# Altium PCB stc-mainboard-v2.PcbDoc
Units mil, origin at the board's own origin, x right, y up, seen from the top; angles counter-clockwise.
Board outline 4725.03 x 3095.65 mil, 2 copper layers (Top Layer, Bottom Layer); 86 components, 82 nets, 391 pads, 141 vias.
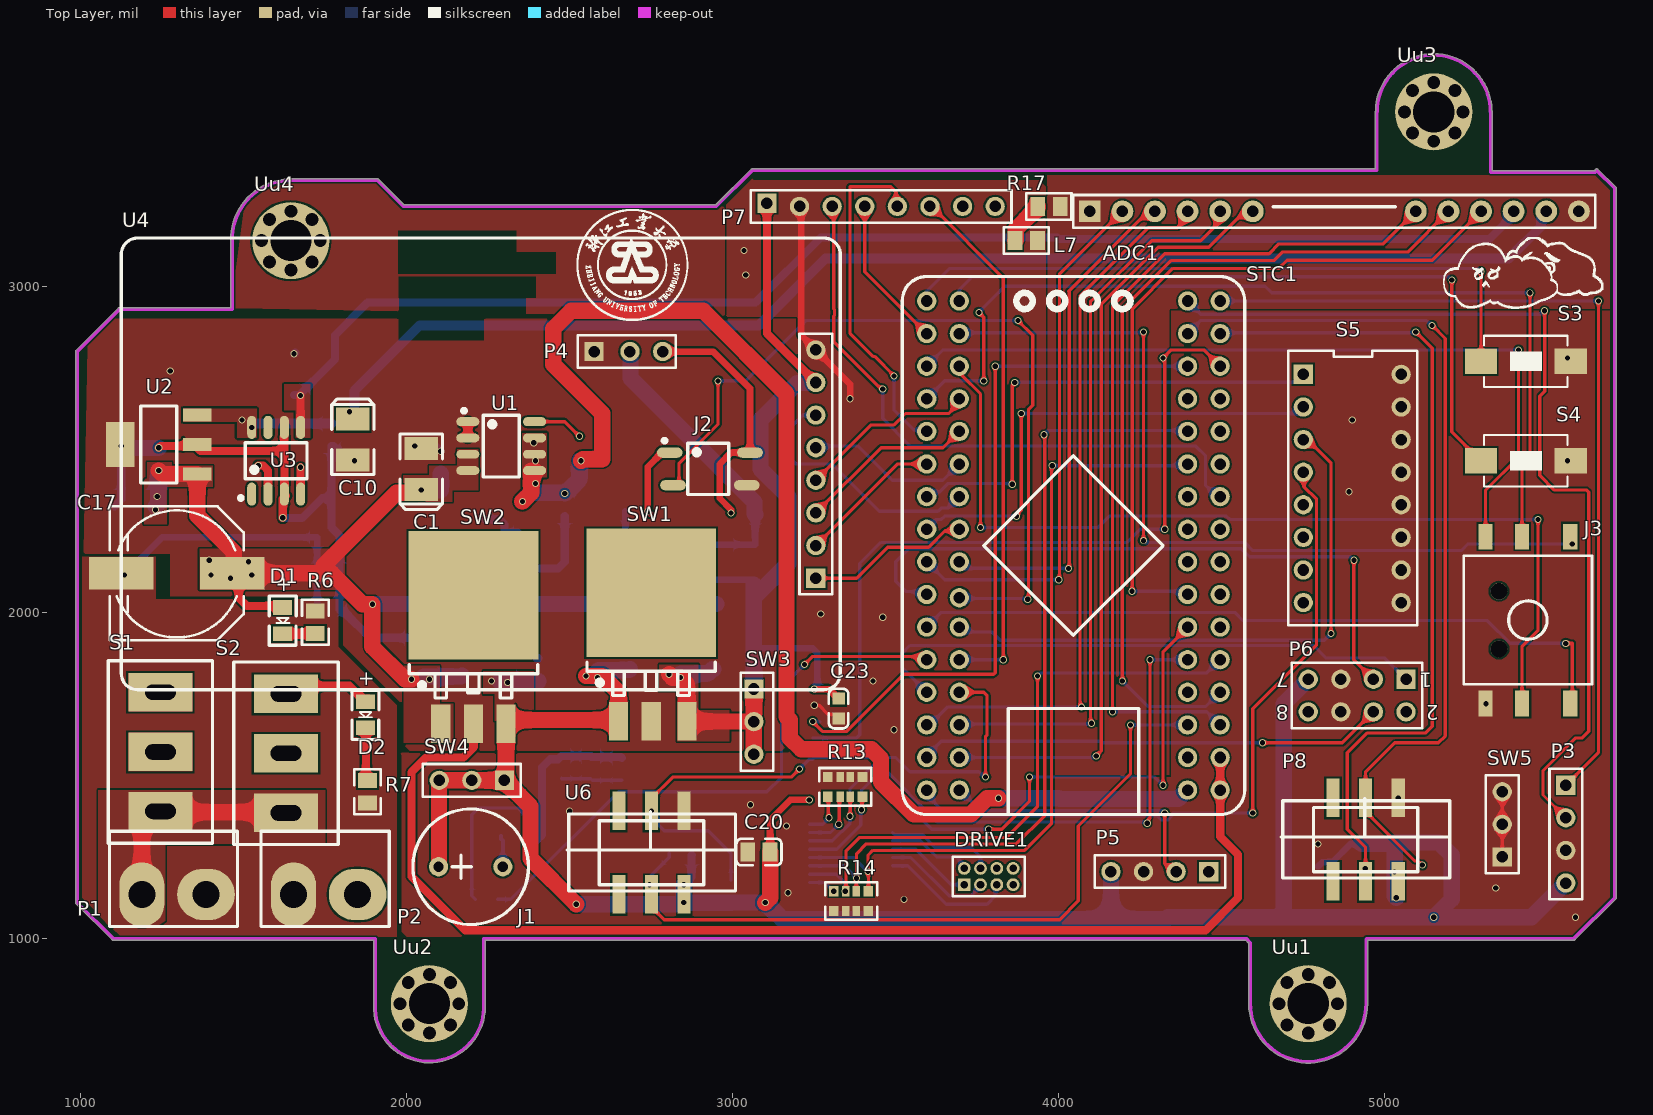
[diagram p0: Top Layer view]
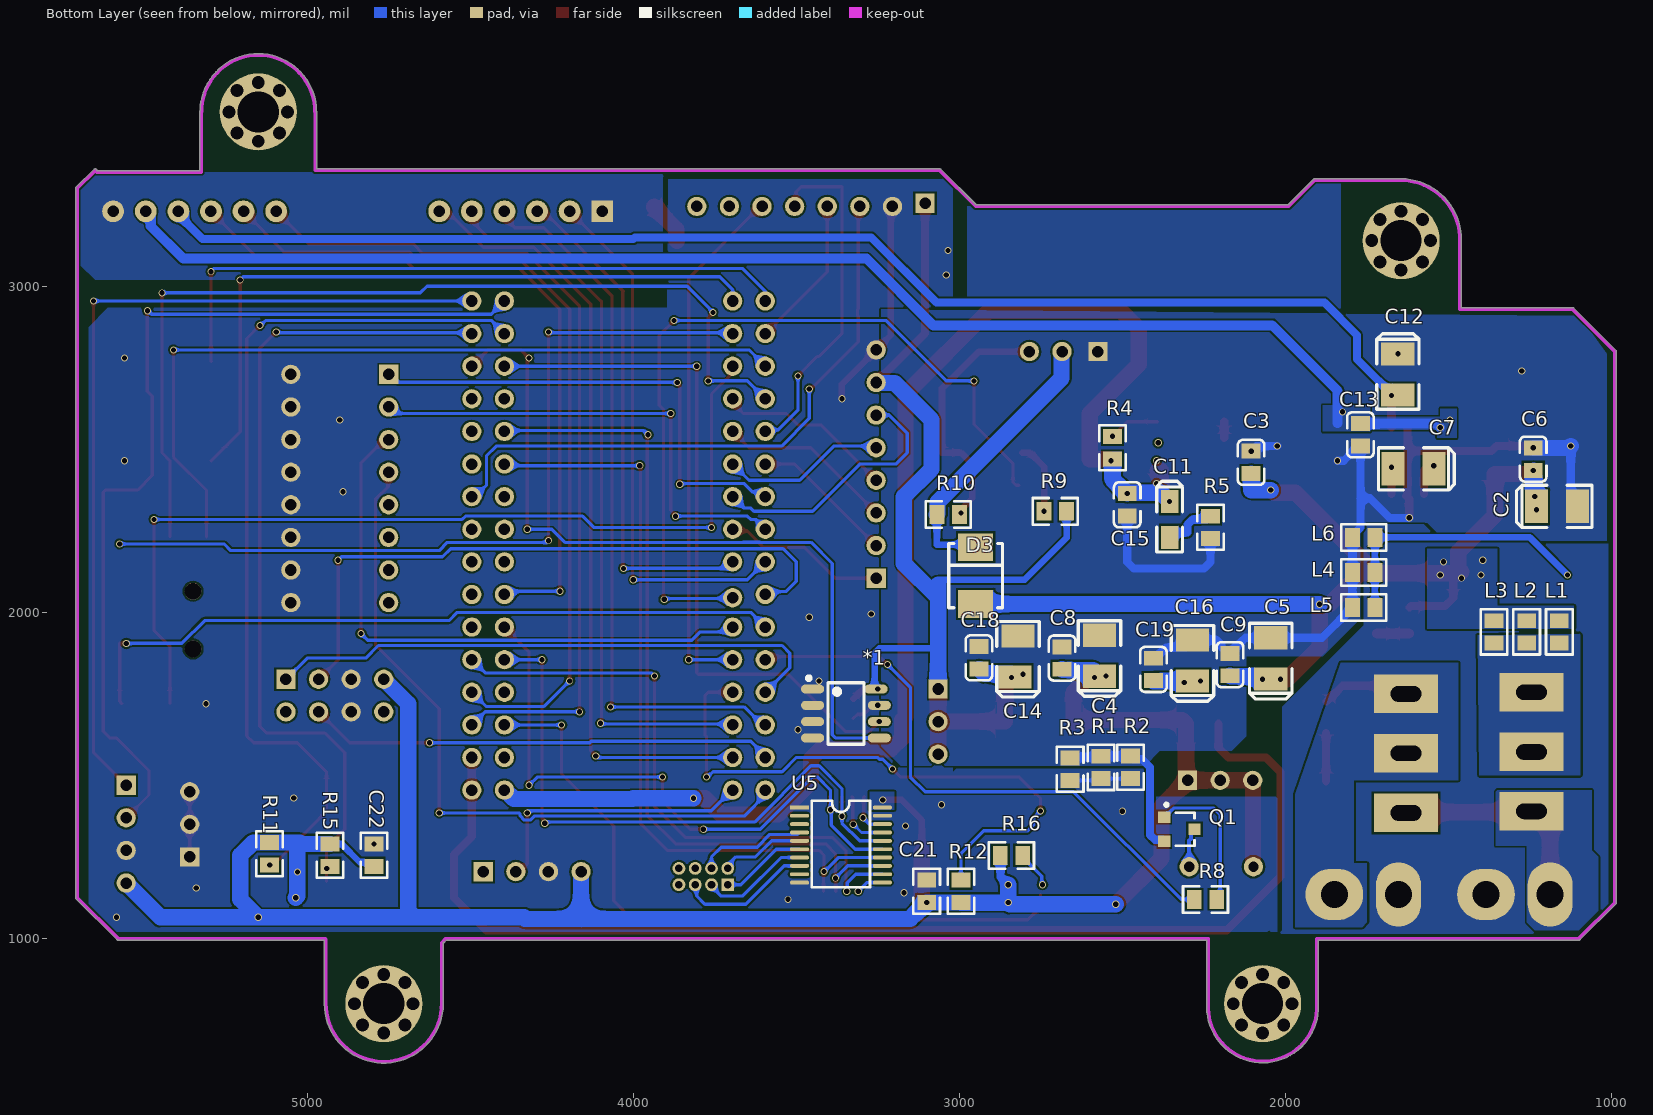
[diagram p1: Bottom Layer view, seen from below]

## Layer stack, top to bottom
Top Solder: solder mask 0.4, Solder Resist, Dk 3.5
Top Layer: signal copper 1.4
Dielectric 1: dielectric 12.6, FR-4, Dk 4.8
Bottom Layer: signal copper 1.4
Bottom Solder: solder mask 0.4, Solder Resist, Dk 3.5

## Board outline
1096.45,996.45 986.45,1106.45 986.47,1106.44 cw(c990,1110) 984.99,1110 984.99,2800 cw(c990,2800) 986.47,2803.56 986.45,2803.55 1116.45,2933.55 1116.44,2933.53 cw(c1120,2930) 1120,2935.01 1459.98,2935.01 1459.98,3139.97 cw(c1647.5,3142.5) 1644.93,3330.01 cw(c1645,3325) 1645,3330.01 1910,3330.01 cw(c1910,3325) 1913.56,3328.53 1913.55,3328.55 1992.08,3250.01 2947.92,3250.01 3056.45,3358.55 3056.44,3358.53 cw(c3060,3355) 3060,3360.01 4969.98,3360.01 4969.98,3533.57 cw(c4975,3533.57) 4971.43,3537.09 cw(c5150,3535) 5328.55,3538.55 cw(c5325,3535) 5330.02,3535 5330.02,3355.01 5644.98,3355.01 cw(c5650,3355) 5653.55,3358.55 5708.55,3303.55 5708.53,3303.56 cw(c5705,3300) 5710.02,3300 5710.02,1125 cw(c5705,1125) 5708.53,1121.44 5708.55,1121.45 5583.55,996.45 5583.56,996.47 cw(c5580,1000) 5580,994.99 4947.22,994.99 4947.22,800 cw(c4765,800) 4582.78,800 4582.78,985.12 4572.92,994.99 2241,994.99 2241,798.64 cw(c2070,790) 2241.22,790 cw(c2070,790) 1898.85,795.11 1898.85,993.85 1101.13,993.85 cw(c1101.13,998.87) 1097.07,995.93 cw(c1100,1000)

## Design rules (kind name [scope] priority, off if disabled: settings)
Clearance [All] p1: gap=6 ignorepadtopadclearanceinfootprint=TRUE except(0: Arc-Hole Track-Hole SMDPad-Hole THPad-Hole Via-Hole Fill-Hole Poly-Hole Region-Hole Text-Hole)
ComponentClearance [All] p1: gap=0 collisioncheckmode=3 verticalgap=0 showdistances=TRUE
Height [All] p1: minheight=0 maxheight=99999 prefheight=500
HoleSize [All] p1: absolutevalues=TRUE maxlimit=99999 minlimit=0 maxpercent=80.000 minpercent=20.000
HoleToHoleClearance [All] p1: gap=0 allowstackedmicrovias=TRUE
MinimumSolderMaskSliver [All] p1: minsoldermaskwidth=0
PolygonConnect [All] p1: connectstyle=Direct reliefconductorwidth=10 reliefentries=4 polygonreliefangle="90 Angle" airgapwidth=10
RoutingVias [All] p1: holewidth=16 width=22 viastyle="Through Hole" minholewidth=16 minwidth=22 maxholewidth=28 maxwidth=50
SilkToSilkClearance [All] p1: silktosilkclearance=0
SilkToSolderMaskClearance [IsPad] p1: minsilkscreentomaskgap=0 clearancetoexposedcopper=TRUE
SolderMaskExpansion [All] p1: expansion=4 istentingtop=FALSE
Width [All] p1: maxlimit=100 minlimit=10 preferedwidth=10
Width Width_1 [All] p2: maxlimit=100 minlimit=10 preferedwidth=20
23 further rules are at their usual default settings.

## Components (designator, comment, footprint, x,y, rotation, side; value= is the part's Value field where it differs from the comment)
*1 "Component_1" LC-SOIC-8_150mil#1 3347.64,1690 r270 bottom
ADC1 "ADC" HDR2.54-Y-LI-16P 4845,3230 r0 top
C1 "Cap-Pol" LC-CASE-B_3528#1 2045,2440 r270 top value=10uF
C2 "Cap-Pol" LC-CASE-B_3528#1 1167.01,2325 r0 bottom value=47uF
C3 "Cap" LC-0805_C 2105,2460 r270 bottom value=0.1uF
C4 "10uf" LC-CASE-B_3528#1 2570,1867.01 r270 bottom
C5 "10uf" LC-CASE-B_3528#1 2045,1859.17 r270 bottom
C6 "Cap" LC-0805_C 1240,2470 r270 bottom value=0.1uF
C7 "47uF" LC-CASE-B_3528#1 1607.01,2440 r180 bottom
C8 "104" LC-0805_C 2685,1860 r270 bottom
C9 "104" LC-0805_C 2170,1840 r270 bottom
C10 "Cap-Pol" LC-CASE-B_3528#1 1835,2530 r90 top value=47uF
C11 "Cap-Pol" LC-CASE-A_3216 2355,2285 r90 bottom value=10uF
C12 "47uF" LC-CASE-B_3528#1 1655,2730 r90 bottom
C13 "Cap" LC-0805_C 1770,2544.45 r90 bottom value=0.1uF
C14 "10uF" LC-CASE-B_3528#2 2820,1865 r270 bottom
C15 "Cap" LC-0805_C 2485,2330 r90 bottom value=0.1uF
C16 "10uF" LC-CASE-B_3528#1 2285,1852.17 r270 bottom
C17 "Cap-Pol-ES" C-RB-SD10 1295,2120 r180 top value=470uF
C18 "104" LC-0805_C 2940,1860.55 r270 bottom
C19 "104" LC-0805_C 2405,1825 r270 bottom
C20 "Cap" LC-0805_C 3080.55,1265 r0 top value=0.1uF
C21 "Cap" LC-0805_R 3100,1145 r270 bottom value=0.1uF
C22 "Cap" LC-0805_R 4795,1255.55 r270 bottom value=0.1uF
C23 "Cap" LC-0603_C 3325,1705 r90 top value=0.1uF
D1 "LED" LED0805 1619.8,2015 r270 top
D2 "LED" LED0805 1873.58,1726.42 r270 top
D3 "D Schottky" LC-SMB(DO-214AA)_S1 2950,2112.99 r270 bottom
DRIVE1 "DRVE" MHDR2X4 3710,1165 r0 top
J1 "BEEP" FMQ-mini 2098.15,1220 r0 top
J2 "TLP521" LC-SOP-4_P2.54 2925,2440 r0 top
J3 "导航按键" KEY_5 5308.66,1720.51 r90 top
L1 "Inductor" LC-0805_L 1160,1940 r90 bottom value=10uH
L2 "Inductor" LC-0805_L 1260,1940 r90 bottom value=10uH
L3 "Inductor" LC-0805_L 1360,1940 r90 bottom value=10uH
L4 "Inductor" LC-0805_L 1760,2122.5 r0 bottom value=10uH
L5 "Inductor" LC-0805_L 1760,2015 r0 bottom value=10uH
L6 "Inductor" LC-0805_L 1759.45,2230 r0 bottom value=10uH
L7 "10UH" LC-0805_L 3900,3140 r0 top
P1 "POWER" "Con 2接线端子" 1286.57,1135 r0 top
P2 "MOTOR" "Con 2接线端子" 1751.57,1135 r0 top
P3 "Header 4" HDR1X4 5555,1470 r270 top
P4 "FUTUBA" HDR3X1-2.54 2575,2800 r0 top
P5 "Header 4" HDR1X4 4460,1205 r180 top
P6 "蓝牙1" HDR2X4 5065,1795 r180 top
P7 "陀螺仪" HDR1X8 3105,3245 r0 top
P8 "编码器" 编码器 4960,1330 r0 top
Q1 "S8050" SOT23-3 2325,1335 r270 bottom
R1 "Res1" LC-0805_R 2565,1524.45 r270 bottom value=0
R2 "Res1" LC-0805_R 2475,1525.55 r270 bottom value=0
R3 "Res1" LC-0805_R 2660,1519.45 r270 bottom value=0
R4 "Res1" LC-0805_R 2530,2505 r90 bottom value=250K
R5 "Res1" LC-0805_R 2230,2260.55 r90 bottom value=1R
R6 "Res1" LC-0805_R 1720,1969.45 r270 top value=1K5
R7 "Res1" LC-0805_R 1880,1450 r90 top value=1k5
R8 "Res1" LC-0805_R 2245,1120 r0 bottom value=4K7
R9 "Res1" LC-0805_R 2705.55,2310 r180 bottom value=100
R10 "Res1" LC-0805_R 3034.45,2300 r180 bottom value=1.9K
R11 "Res1" LC-0805_R 5115,1260 r270 bottom value=4K7
R12 "4.7k" LC-0805_R 2995,1144.45 r90 bottom value=4K7
R13 "Res Pack" LC-0603_Rx4 3345,1465 r0 top value=1K
R14 "Res Pack" LC-0603_Rx4 3363.15,1114.69 r180 top value=1K
R15 "Res1" LC-0805_R 4930,1255.55 r270 bottom value=4K7
R16 "4.7k" LC-0805_R 2840,1255 r180 bottom value=4K7
R17 "0k" LC-0805_L 3970,3245 r180 top value=0R
S1 "SW-SPDT" 纽子开关 1245,1570 r180 top
S2 "SW-SPDT" 纽子开关 1630,1570 r0 top
S3 "SW-PB" SW_PB2_A1 5430,2770 r270 top
S4 "SW-PB" SW_PB2_A1 5430,2465 r270 top
S5 "拨码开关" DIP-16-KEY 4750,2730 r270 top
STC1 "STC16H40K128" STC16H40K128_CoreBoard 4045,2205 r180 top locked
SW1 "Switch" LC-TO-263-3#1 2750,1666.3 r270 top
SW2 "Switch" LC-TO-263-3#2 2205,1658.46 r270 top
SW3 "Switch" HDR3X1_2.54_3pin#1 3075,1765 r270 top
SW4 "Switch" HDR3X1_2.54_3pin#2 2300,1485 r180 top
SW5 "Switch" HDR3X1_2.54_3pin#2 5360,1250 r90 top
U1 "TPS7350" LC-SOIC-8_150mil#2 2290,2510 r270 top
U2 "LM2940" LC-SOT-223 1240,2515 r0 top
U3 "LM2662" LC-SOIC-8_150mil#2 1600,2465 r0 top
U4 "TFT_LCD" TFT1.8 3299,2505 r0 top locked
U5 "74HC245" TSSOP20 3490,1401.77 r180 bottom
U6 "编码器" 编码器 2770,1290 r0 top
Uu1 "定位孔" 定位孔 4765,800 r0 top
Uu2 "定位孔" 定位孔 2070,800 r0 top
Uu3 "定位孔" 定位孔 5150,3535 r0 top
Uu4 "定位孔" 定位孔 1645,3140 r0 top

## Footprints (in the part's own frame and the unit in brackets; to place one, negate y for a bottom-side part, rotate by r counter-clockwise, add the part's x,y. Pads: shape width x height; smd on the part's side, far side on the other; paste and mask are expansions set on the pad)
C-RB-SD10 [mm]
  rect 5x2.5 smd: 1(-4.318,0) 2(4.318,0)
  silkscreen extent -5.21,-5.21 5.21,5.21, body extent -5.8,-5.15 5.8,5.15, height 10.2
"Con 2接线端子" [mm]
  oval 3.5x5 hole 2.1: 1(-2.5,0)
  oval 4.5x4 hole 2.1: 2(2.5,0)
  silkscreen extent -5.03,-2.49 4.95,4.93, body extent -5,-2.5 5,5.5, height 1.5
DIP-16-KEY [mm]
  rect 1.5x1.5 hole 0.9: 1(0,0)
  round 1.5 hole 0.9: 2(2.54,0) 3(5.08,0) 4(7.62,0) 5(10.16,0) 6(12.7,0) 7(15.24,0) 8(17.78,0) 9(17.78,7.62) 10(15.24,7.62) 11(12.7,7.62) 12(10.16,7.62) 13(7.62,7.62) 14(5.08,7.62) 15(2.54,7.62) 16(0,7.62)
  silkscreen extent -1.83,-1.17 19.53,8.89, body extent -1.8,-1.09 19.52,8.81, height 7
FMQ-mini [mm]
  round 1.5 hole 0.8: 1(0,0) 2(5,0)
  silkscreen extent -2,-4.5 7,4.5
HDR1X4 [mm]
  rect 1.5x1.5 hole 0.9: 1(0,0)
  round 1.5 hole 0.9: 2(2.54,0) 3(5.08,0) 4(7.62,0)
  silkscreen extent -1.27,-1.27 8.89,1.27
HDR1X8 [mm] "Connector; Header; 8 Position"
  rect 1.5x1.5 hole 0.9: 1(0,0.254)
  round 1.5 hole 0.9: 2(2.54,0) 3(5.08,0) 4(7.62,0) 5(10.16,0) 6(12.7,0) 7(15.24,0) 8(17.78,0)
  silkscreen extent -1.27,-1.27 19.05,1.27
HDR2.54-Y-LI-16P [mm] "圆孔排母，16脚"
  rect 1.7x1.7 hole 0.9: 1(-19.05,0)
  round 1.7 hole 0.9: 2(-16.51,0) 3(-13.97,0) 4(-11.43,0) 5(-8.89,0) 6(-6.35,0) 7(6.35,0) 8(8.89,0) 9(11.43,0) 10(13.97,0) 11(16.51,0) 12(19.05,0)
  silkscreen extent -20.32,-1.27 20.32,1.27, body extent -20.32,-1.27 20.32,1.27, height 4.31
HDR2X4 [mm] "Connector; Header; 4x2 Position"
  rect 1.5x1.5 hole 0.9: 1(0,0)
  round 1.5 hole 0.9: 2(0,2.54) 3(2.54,0) 4(2.54,2.54) 5(5.08,0) 6(5.08,2.54) 7(7.62,0) 8(7.62,2.54)
  silkscreen extent -1.27,-1.27 8.89,3.81
HDR3X1-2.54 [mm] "2.54单排针排座"
  rect 1.5x1.5 hole 0.9: 1(0,0)
  round 1.5 hole 0.9: 2(2.794,0) 3(5.334,0)
  silkscreen extent -1.27,-1.27 6.35,1.27, body extent -1.27,-1.27 6.35,1.27, height 8.54
HDR3X1_2.54_3pin#1 [mm] "2.54单排针排座"
  rect 1.5x1.5 hole 0.9: 1(0,-0.254)
  round 1.5 hole 0.9: 2(2.54,-0.254) 3(5.08,-0.254)
  silkscreen extent -1.27,-1.27 6.35,1.27, body extent -1.27,-1.27 6.35,1.27, height 8.54
HDR3X1_2.54_3pin#2 [mm] "2.54单排针排座"
  rect 1.5x1.5 hole 0.9: 1(0,0)
  round 1.5 hole 0.9: 2(2.54,0) 3(5.08,0)
  silkscreen extent -1.27,-1.27 6.35,1.27, body extent -1.27,-1.27 6.35,1.27, height 8.54
KEY_5 [mm]
  round 1.3 hole 1.3: 0(4.25,-1.05) 0(8.75,-1.05)
  rect 2x1.1 smd: 1(0,0) 2(0,-2.85) 3(0,-6.6) 4(13,0) 5(13,-2.85) 6(13,-6.6)
  silkscreen extent 1.5,-8.3 11.5,1.7
LC-0603_C [mm]
  rect 0.93x0.98 smd: 1(-0.77,0) 2(0.77,0)
  silkscreen extent -1.55,-0.76 1.55,0.76, body extent -0.8,-0.4 0.8,0.4, height 0.6
LC-0603_Rx4 [mm]
  rect 0.75x0.8 smd mask+0.051: 1(-1.35,-0.77) 4(1.35,-0.77) 5(1.35,0.77) 8(-1.35,0.77)
  rect 0.58x0.8 smd mask+0.051: 2(-0.4,-0.77) 3(0.4,-0.77) 6(0.4,0.77) 7(-0.4,0.77)
  silkscreen extent -2.02,-1.47 2.03,1.47, body extent -1.6,-0.8 1.6,0.8, height 0.55
LC-0805_C [mm]
  rect 1.16x1.47 smd: 1(-0.875,0) 2(0.875,0)
  silkscreen extent -1.76,-1.04 1.76,1.04, body extent -1,-0.61 1,0.64, height 0.8
LC-0805_L [mm]
  rect 1.16x1.47 smd: 1(-0.875,0) 2(0.875,0)
  silkscreen extent -1.75,-1.03 1.75,1.03, body extent -1,-0.6 1,0.6, height 0.95
LC-0805_R [mm]
  rect 1.16x1.47 smd: 1(-0.875,0) 2(0.875,0)
  silkscreen extent -1.75,-1.03 1.75,1.03, body extent -1,-0.6 1,0.6, height 0.5
LC-CASE-A_3216 [mm]
  rect 1.8x1.35 smd: 1(1.4,0) 2(-1.4,0)
  silkscreen extent -2.54,-1 2.97,1, body extent -1.7,-0.84 1.7,0.84, height 1.71
LC-CASE-B_3528#1 [mm]
  rect 1.8x2.6 smd: 1(1.6,0) 2(-1.6,0)
  silkscreen extent -2.73,-1.65 3.16,1.65, body extent -1.85,-1.47 1.85,1.46, height 2.03
LC-CASE-B_3528#2 [mm]
  rect 1.8x2.6 smd: 1(1.6,-0.254) 2(-1.6,0)
  silkscreen extent -2.73,-1.65 3.16,1.65, body extent -1.85,-1.47 1.85,1.46, height 2.03
LC-SMB(DO-214AA)_S1 [mil]
  rect 85x107.99 smd: 1(87.01,0) 2(-87.01,0)
  silkscreen extent -98,-83 98,83, body extent -110,-77 110,77, height 98
LC-SOIC-8_150mil#1 [mm]
  oval 0.7x1.8 smd: 1(-1.905,-2.6) 2(-0.635,-2.6) 3(0.635,-2.6) 4(1.905,-2.6) 5(1.905,2.6) 6(0.635,2.6) 7(-0.635,2.6) 8(-1.905,2.346)
  silkscreen extent -2.9,-3.05 2.4,1.4, body extent -2.45,-3 2.45,3, height 1.7
LC-SOIC-8_150mil#2 [mm]
  oval 0.7x1.8 smd: 1(-1.905,-2.6) 2(-0.635,-2.6) 3(0.635,-2.6) 4(1.905,-2.6) 5(1.905,2.6) 6(0.635,2.6) 7(-0.635,2.6) 8(-1.905,2.6)
  silkscreen extent -2.9,-3.05 2.4,1.4, body extent -2.45,-3 2.45,3, height 1.7
LC-SOP-4_P2.54 [mm]
  oval 2x0.8 smd: 1(-3,1.27) 2(-2.746,-1.27) 3(3,-1.27) 4(3.254,1.27)
  silkscreen extent -3.55,-2 1.6,2.35, body extent -3.5,-2.45 3.5,2.45, height 2.9
LC-SOT-223 [mm]
  rect 2.2x1 smd: 1(3,-2.3) 2(3,0) 3(3,2.3)
  rect 2.2x3.5 smd: 4(-3,0)
  silkscreen extent -1.4,-3 1.4,3, body extent -3.48,-3.25 3.48,3.25, height 1.7
LC-TO-263-3#1 [mm]
  rect 10x10.1 smd: 0(-10,0)
  rect 3x1.5 smd: 1(0,-2.54) 2(0,0) 3(0,2.794)
  silkscreen extent -4.6,-5 -2,5, body extent -13.73,-5.08 0.5,5.08, height 4.87
LC-TO-263-3#2 [mm]
  rect 10x10.1 smd: 0(-10,0)
  rect 3x1.5 smd: 1(0,-2.54) 2(0,0) 3(0,2.54)
  silkscreen extent -4.6,-5 -2,5, body extent -13.73,-5.08 0.5,5.08, height 4.87
LED0805 [mil]
  rect 45x58 smd: 1(0,0) 2(80,0.2)
  silkscreen extent -35,-41 116,42, body extent 0,-25 80,25, height 43
MHDR2X4 [mm] "Connector; Header; 4x2 Position"
  rect 1x1 hole 0.6: 1(0,0)
  round 1 hole 0.6: 2(0,1.27) 3(1.27,0) 4(1.27,1.27) 5(2.54,0) 6(2.54,1.27) 7(3.81,0) 8(3.81,1.27)
  silkscreen extent -0.9,-0.9 4.71,2.17
SOT23-3 [mm]
  rect 0.9x0.95 smd: 1(-0.95,-1.175) 2(0.95,-1.175) 3(0,1.175)
  silkscreen extent -2.03,-1.14 1.3,1.18, body extent -1.45,-1.4 1.45,1.4, height 1.2
STC16H40K128_CoreBoard [mm] "逐飞科技STC16H40K128_CoreBoard"
  round 1.5 hole 0.9: 1(-11.43,19.05) 2(-8.89,19.05) 3(-11.43,16.51) 4(-8.89,16.51) 5(-11.43,13.97) 6(-8.89,13.97) 7(-11.43,11.43) 8(-8.89,11.43) 9(-11.43,8.89) 10(-8.89,8.89) 11(-11.43,6.35) 12(-8.89,6.35) 13(-11.43,3.81) 14(-8.89,3.81) 15(-11.43,1.27) 16(-8.89,1.27) 17(-11.43,-1.27) 18(-8.89,-1.27) 19(-11.43,-3.81) 20(-8.89,-3.81) 21(-11.43,-6.35) 22(-8.89,-6.35) 23(-11.43,-8.89) 24(-8.89,-8.89) 25(-11.43,-11.43) 26(-8.89,-11.43) 27(-11.43,-13.97) 28(-8.89,-13.97) 29(-11.43,-16.51) 30(-8.89,-16.51) 31(-11.43,-19.05) 32(-8.89,-19.05) 33(8.89,-19.05) 34(11.43,-19.05) 35(8.89,-16.51) 36(11.43,-16.51) 37(8.89,-13.97) 38(11.43,-13.97) 39(8.89,-11.43) 40(11.43,-11.43) 41(8.89,-8.89) 42(11.43,-8.89) 43(8.89,-6.35) 44(11.43,-6.35) 45(8.89,-3.81) 46(11.43,-3.81) 47(8.89,-1.27) 48(11.43,-1.27) 49(8.89,1.27) 50(11.43,1.27) 51(8.89,4.064) 52(11.43,3.81) 53(8.89,6.35) 54(11.43,6.35) 55(8.89,8.89) 56(11.43,8.89) 57(8.89,11.43) 58(11.43,11.43) 59(8.89,13.97) 60(11.43,13.97) 61(8.89,16.51) 62(11.43,16.51) 63(8.89,19.05) 64(11.43,19.05)
  silkscreen extent -13.34,-20.95 13.34,20.95
SW_PB2_A1 [mm]
  rect 2x2.5 smd: 1(0,3.556) 2(0,-3.444)
  silkscreen extent -2,-3.19 2,3.31, body extent -1.93,-3.94 1.92,3.95, height 2.5
TFT1.8 [mm]
  rect 1.5x1.5 hole 0.9: 1(-1.118,-10.16)
  round 1.5 hole 0.9: 2(-1.118,-7.62) 3(-1.118,-5.08) 4(-1.118,-2.54) 5(-1.118,0) 6(-1.118,2.54) 7(-1.118,5.08) 8(-1.118,7.62)
  silkscreen extent -55.22,-18.85 0.79,16.33
TSSOP20 [mm]
  rect 1.5x0.3 smd: 1(0,0)
  oval 1.5x0.3 smd: 2(0,-0.65) 3(0,-1.3) 4(0,-1.95) 5(0,-2.6) 6(0,-3.25) 7(0,-3.9) 8(0,-4.55) 9(0,-5.2) 10(0,-5.85) 11(6.454,-5.85) 12(6.454,-5.2) 13(6.454,-4.55) 14(6.454,-3.9) 15(6.454,-3.25) 16(6.454,-2.6) 17(6.454,-1.95) 18(6.454,-1.3) 19(6.454,-0.65) 20(6.454,0)
  silkscreen extent 0.97,-6.2 5.49,0.51, body extent -0.05,-6.22 6.5,0.38, height 1.2
定位孔 [mm]
  round 6 hole 3.2: 1(0,0)
  round 1 hole 1: ""(-2.286,0) ""(-1.651,-1.651) ""(-1.651,1.651) ""(0,-2.286) ""(0,2.286) ""(1.651,-1.651) ""(1.651,1.651) ""(2.286,0)
纽子开关 [mm]
  rect 5x3 hole 1.2 slot 2.4 at 0 deg: 1(0,-4.699) 2(0,-0.051) 3(0,4.572)
  silkscreen extent -4.06,-7.16 4.06,7.06, body extent -4.14,-6.63 3.86,6.57, height 33.36
编码器 [mm]
  rect 1.02x3 smd: 1(2.057,2.564) 2(2.057,-3.936) 3(-0.483,2.564) 4(-0.483,-3.936) 5(-3.023,2.564) 6(-3.023,-3.936)
  silkscreen extent -7.06,-3.66 6.07,2.52

## Part data
C1 C2 C10 C11: library part Cap-Pol-A, "钽电容", LatestRevisionDate=17-Jul-2002, LatestRevisionNote="Re-released for DXP Platform.", PackageReference=RB7.6-15, Published=8-Jun-2000, Publisher="Altium Limited"
C3 C6 C13 C15 C20 C21 C22 C23: "Capacitor", LatestRevisionDate=17-Jul-2002, LatestRevisionNote="Re-released for DXP Platform.", PackageDescription="Radial Cap, Thru-Hole; 2 Leads; 0.3 in Pin Spacing", PackageReference=RAD-0.3, Published=8-Jun-2000, Publisher="Altium Limited"
C4 C5 C14 C16: library part ELECTRO2, "Electrolytic Capacitor"
C7 C12: library part ELECTRO2_1, "Electrolytic Capacitor"
C8 C9 C18 C19: library part CAP-0603
C17: "固态电容", LatestRevisionDate=17-Jul-2002, LatestRevisionNote="Re-released for DXP Platform.", PackageReference=RB7.6-15, Published=8-Jun-2000, Publisher="Altium Limited"
D1 D2: library part LED0, "Typical INFRARED GaAs LED", LatestRevisionDate=08-Jul-2005, LatestRevisionNote="Mech Layer 1 removed.", PackageDescription="LED; 2 Leads", PackageReference=LED-0, Published=8-Jun-2000, Publisher="Altium Limited"
D3: "Schottky Diode", Code_JEDEC=DO-214-AA, LatestRevisionDate=17-Jul-2002, LatestRevisionNote="Re-released for DXP Platform.", PackageDescription="DO-214-AA/SMB; 2 C-Bend Leads; Body 5.3 x 3.6 mm, inc. leads (LxW)", PackageReference=SMB, Published=8-Jun-2000, Publisher="Altium Limited"
DRIVE1 P6: library part "Header 4X2", "电机驱动接口", LatestRevisionDate=17-Jul-2002, LatestRevisionNote="Re-released for DXP Platform.", Publisher="Altium Limited"
J1: library part BEEP-S, "有源蜂鸣器0905"
J2: library part TLP281, "光耦", DatasheetDocument=Nov-2003, LatestRevisionDate=04-Mar-2005, LatestRevisionNote="Sch pins 3 & 4 Swapped.", PackageReference=DIP-4, Published=24-Mar-1999, Publisher="Altium Limited"
J3: library part KEY_5, "五向导航按键"
L7: library part "0805 电感_L"
P1 P2: library part "Header 2", "Header, 2-Pin", LatestRevisionDate=17-Jul-2002, LatestRevisionNote="Re-released for DXP Platform.", Publisher="Altium Limited"
P3 P5: "Header, 4-Pin", LatestRevisionDate=17-Jul-2002, LatestRevisionNote="Re-released for DXP Platform.", Publisher="Altium Limited"
P4: library part "Header 3", "Header, 3-Pin", LatestRevisionDate=17-Jul-2002, LatestRevisionNote="Re-released for DXP Platform.", Publisher="Altium Limited"
P7: library part "Header 8", "Header, 8-Pin", LatestRevisionDate=17-Jul-2002, LatestRevisionNote="Re-released for DXP Platform.", Publisher="Altium Limited"
P8 U6: library part "Header 3X2", "光电编码器接口", LatestRevisionDate=17-Jul-2002, LatestRevisionNote="Re-released for DXP Platform.", Publisher="Altium Limited"
Q1: library part SS9014, "NPN贴片三极管", PackageDocument=Sep-1998, Code_JEDEC=TO-92A, ComponentLink1Description="Manufacturer Link", ComponentLink1URL=http://www.fairchildsemi.com/, ComponentLink2Description=Datasheet, ComponentLink2URL=http://www.fairchildsemi.com/ds/2N%2F2N3904.pdf, DatasheetDocument=1997, LatestRevisionDate=15-Jan-2003, LatestRevisionNote="PCB Footprint 'BCY-W3/D4.7' replaced", PackageReference=TO-92A, Published=8-Jun-2000, Publisher="Altium Limited"
R1 R2 R3 R4 R5 R6 R7 R8 R9 R10 R11 R15: "Resistor", LatestRevisionDate=17-Jul-2002, LatestRevisionNote="Re-released for DXP Platform.", PackageDescription="Axial Device, Thru-Hole; 2 Leads; 0.3 in Pin Spacing", PackageReference=AXIAL-0.3, Published=8-Jun-2000, Publisher="Altium Limited"
R12 R16: library part Res1, "Resistor", LatestRevisionDate=17-Jul-2002, LatestRevisionNote="Re-released for DXP Platform.", PackageDescription="Axial Device, Thru-Hole; 2 Leads; 0.3 in Pin Spacing", PackageReference=AXIAL-0.3, Published=8-Jun-2000, Publisher="Altium Limited"
R13 R14: "Isolated Resistor Network", Code_IPC=SOIC127P600-16, Code_JEDEC=MS-012-AC, LatestRevisionDate=29-May-2009, LatestRevisionNote="IPC-7351 Footprint Added.", PackageDescription="16-Pin Small Outline Integrated Circuit 1.27 mm Pitch", PackageReference=SO-16, Published=24-Mar-1999, Publisher="Altium Limited"
R17: library part Res_L, "Resistor", LatestRevisionDate=17-Jul-2002, LatestRevisionNote="Re-released for DXP Platform.", PackageReference=AXIAL-0.4, Published=8-Jun-2000, Publisher="Altium Limited"
S1 S2: "SPDT Subminiature Toggle Switch, Right Angle Mounting, Vertical Actuation", ComponentLink1Description="Manufacturer Link", ComponentLink1URL=http://www.apem.com, DatasheetVersion=05-Dec-2000, LatestRevisionDate=17-Dec-2003, LatestRevisionNote="Schematic revised, PCB Footprint replaced.", PackageDescription="Switch; 4 Leads", PackageReference=TL36WW15050, Published=24-Mar-1999, Publisher="Altium Limited"
S3 S4: "两脚贴片微动开关", LatestRevisionDate=17-Jul-2002, LatestRevisionNote="Re-released for DXP Platform.", PackageReference=SPST-2, Published=24-Mar-1999, Publisher="Altium Limited"
S5: library part SW-DIP8, "八位拨码开关", ComponentLink1Description="Manufacturer Link", ComponentLink1URL=http://www.oupiin.com/prodindx.html#Headers, LatestRevisionDate=17-Dec-2003, LatestRevisionNote="PCB Footprint replaced.", PackageDescription="DIP; 16 Leads; Row Spacing 7.62 mm; Pitch 2.54 mm", PackageReference=DIP-16-KEY, Published=24-Mar-1999, Publisher="Altium Limited"
STC1: library part STC16H40K128_CoreBoard, "逐飞科技 STC16H40K128核心板"
SW1 SW2 SW3 SW4 SW5: library part 3
U1: library part TPS7350QD, "Single Output LDO, 500 mA, Fixed 5 V Output, 5.33 to 10 V Input, with Integrated SVS, 8-pin SOIC (D), -40 to 125 degC, Green (RoHS & no Sb/Br)", Manufacturer="Texas Instruments", Supplier Part Number 1=296-8069-5-ND, Code_JEDEC=MS-012, ComponentLink1Description="Manufacturer URL", ComponentLink1URL=http://www.ti.com/, ComponentLink2Description=Datasheet, ComponentLink2URL=http://www.ti.com/general/docs/lit/getliterature.tsp?genericPartNumber=TPS7350&fileType=pdf, ComponentLink3Description="Package Specification", ComponentLink3URL=http://www.ti.com/litv/pdf/msoi002j, DatasheetVersion=SLVS124F, Eco-Plan="Green (RoHS & no Sb/Br)", Fixed Output Options(V)=5, Iout(Max)(A)=0.5, Iq(Typ)(mA)=0.3, Mounting Technology="Surface Mount", PackageDescription="8-Pin Plastic Small Outline, Body 4.9 x 3.9 mm, Pitch 1.27 mm", PackageReference=D8, PackageVersion=4040047-3/M, PartNumber=TPS7350QD, SubFamily="Single Channel LDO", Supplier 1=Digi-Key, Supplier 2=Farnell, Supplier 3=Newark, Supplier 4=Newark, Supplier 5=Mouser, Supplier Part Number 2=8461147, Supplier Part Number 3=38K8800, Supplier Part Number 4=52F2805, Supplier Part Number 5=595-TPS7350QD, Vdo(Typ)(mV)=270, Vin(Max)(V)=10, Vin(Min)(V)=5.33, Vout Adj(Max)(V)=5, Vout Adj(Min)(V)=5
U2: library part LM2940IMP-5.0, "1A Low Dropout Regulator", DigiKeyPartNumber=LM2940IMP-5.0TR-ND, Manufacturer="National Semiconductor", PackageTopMarking=XYTT*L53B, PowerWise=N, Code_IPC=SOT223-4, Code_JEDEC=TO-261-AA, ComponentLink1Description="LM2940 Datasheet", ComponentLink1URL=http://www.national.com/ds/LM/LM2940.pdf, ComponentLink2Description="LM2940 Web Page", ComponentLink2URL=http://www.national.com/pf/LM/LM2940.html, ComponentLink3Description="MP04A Package Page", ComponentLink3URL=http://www.national.com/packaging/folders/mp04a.html, CompType="LDO IC", DatasheetVersion=Jan-2007, PackageDescription="Molded SOT-223, 6.50 x 3.56 x 1.6mm Body, 4 Lead, 2.3mm Pitch", PackageReference=MP04A, PackageVersion="revB, Apr-2003", PartNumber=LM2940IMP-5.0, PinCount=4, Published=4-Dec-2008, Publisher="Altium Limited", RoHS=O
U5: library part SN74LVC245DW, "Octal Bus Transceiver with 3-State Outputs", Code_IPC=SOIC127P1030-20, Code_JEDEC=MS-013, ComponentAvailability=Obsolete, ComponentLink1Description="Manufacturer Link", ComponentLink1URL=http://www.ti.com/, ComponentLink2Description="URL Link1", ComponentLink2URL=http://focus.ti.com/docs/prod/folders/print/sn74lvc245.html, DatasheetVersion=Jul-1994, LatestRevisionDate=13-Apr-2006, LatestRevisionNote="IPC-7351 Footprint Added.", PackageDescription="20-Pin Plastic Small Outline Integrated Circuit 1.27 mm Pitch", PackageReference=DW020, PackageVersion=Mar-2000, Published=8-Jun-2000, Publisher="Altium Limited"
L1 L2 L3 L4 L5 L6: Code_IEC=1005, Code_JEITA=0402, LatestRevisionDate=29-May-2009, LatestRevisionNote="IPC-7351 Footprint Added.", PackageDescription="Chip Inductor", PackageReference=0402-A, Published=8-Jun-2000, Publisher="Altium Limited"

## Via types
v1: diameter 22, hole 16, Top Layer to Bottom Layer, 141 vias

## Nets (pads, with @x,y where several pads share a name; then routed paths per layer and width w, separated by ;. In a path a pad name is that pad's centre, name@x,y a point inside that pad or via, vN(x,y) a via of type N, cw(c..) or ccw(c..) an arc to the next point about the centre after c; other vN are vias at no path point)
02: P6.3 STC1.52 | length 1997.9
  Top Layer w10: v1(4905,2160) 4905,1855 P6.3
  Bottom Layer w10: STC1.52 3585.61,2064.39 3530.61,2064.39 3500,2095 3500,2155 3540.53,2195.53 4560,2195.53 4585,2170.53 4894.47,2170.53 v1(4905,2160)
03: P6.1 STC1.58 | length 1748.6
  Bottom Layer w10: STC1.58 3520,1830 3520,1875 3543.47,1898.47 4781.53,1898.47 4820,1860 5000,1860 P6.1
04: R12.2 STC1.57 U6.3 | length 1873.1
  Top Layer w10: v1(2751,1390.95) 2751,1429.93 2816.07,1495 3180,1495 v1(3205,1520) ; STC1.57 3770,1755 3780,1745 3780,1624.12 3775,1619.12 v1(3775,1495)
  Bottom Layer w10: v1(2751,1390.95) 2771.65,1370.3 2771.65,1348.35 2790,1330 2925,1330 2995,1260 R12.2 ; v1(3205,1520) 3235,1550 3245,1550 3250,1555 3500,1555 3543.56,1511.44 3755.31,1511.44 3771.75,1495 v1(3775,1495)
07: P6.4 STC1.62 | length 1435.1
  Top Layer w10: v1(4625,1600) 4870,1600 P6.4
  Bottom Layer w10: STC1.62 3595,1560 3640,1605 4128.38,1605 4133.38,1600 v1(4625,1600)
20: STC1.39 U4.4 | length 551.3
  Top Layer w10: U4.4 3425,2575 3495,2575 3530,2610 3663.27,2610 3695,2641.73 STC1.39
21: STC1.41 U4.3 | length 543.6
  Top Layer w10: U4.3 3455,2505 3645,2505 STC1.41
22: STC1.44 U4.2 | length 443.6
  Top Layer w10: U4.2 3505,2455 STC1.44
23: STC1.43 U4.5 | length 506.3
  Bottom Layer w10: U4.5 3260,2510 3385,2510 3490,2405 3645,2405 STC1.43
24: S5.1 STC1.46 | length 1491
  Top Layer w10: v1(3857.24,2392.76) 3857.24,2697.24 v1(3865,2705)
  Bottom Layer w10: STC1.46 3610,2370 3635,2370 3660.53,2395.53 3854.47,2395.53 v1(3857.24,2392.76) ; v1(3865,2705) 3865.47,2705.47 4725.47,2705.47 S5.1
25: STC1.45 U4.6 | length 806
  Bottom Layer w10: U4.6 3215,2605 3160,2550 3160,2490 3195,2455 3305,2455 3450,2310 3630,2310 3640,2320 3660,2320 STC1.45
26: S5.2 STC1.48 | length 1486.5
  Top Layer w10: v1(3870,2295) 3870,2298.25 3885,2313.25 v1(3885,2610)
  Bottom Layer w10: STC1.48 3625,2285 3640,2285 3650.53,2295.53 3869.47,2295.53 v1(3870,2295) ; v1(3885,2610) 4730,2610 S5.2
27: STC1.47 U4.1 | length 502.1
  Top Layer w10: U4.1 3380,2105 3475,2200 3600.86,2200 3650.47,2249.61 3689.61,2249.61 STC1.47
32: *1.6 STC1.28 | length 2199.1
  Top Layer w10: v1(3245.28,1665) 3275.28,1635 3350,1635 3525,1810 3800,1810 3805,1815 v1(3805,2755)
  Bottom Layer w10: v1(3245.28,1665) *1.6@3267.63,1665 ; v1(3805,2755) STC1.28
33: *1.5 STC1.27 | length 2385.9
  Top Layer w10: v1(4325,2255) 4325,2771.75 4320,2776.75 v1(4320,2780) 4345,2805 4445,2805 STC1.27
  Bottom Layer w10: *1.5 3380,1615 3390,1625 3390,2150 3454.47,2214.47 3611.79,2214.47 3612.31,2215 3663.13,2215 3663.66,2214.47 4209.47,2214.47 4250,2255 v1(4325,2255)
34: P8.3 R11.2 STC1.30 | length 2702.4
  Top Layer w10: v1(5115,1225) 5111.75,1225 5099.25,1237.5 5092.5,1237.5 4941,1389 P8.3 4941,1511 5030,1600 5164.14,1600 5185,1620.86 5185,2840 v1(5145,2880)
  Bottom Layer w10: STC1.30 4435.53,2895.53 5126.23,2895.53 5141.75,2880 v1(5145,2880)
35: P8.4 R15.2 STC1.29 | length 2543.6
  Top Layer w10: P8.4 4941,1279 4885,1335 4885,1570 4945,1630 5124.14,1630 5145,1650.86 5145,2810 v1(5095,2860)
  Bottom Layer w10: STC1.29 4497.7,2857.7 5092.7,2857.7 v1(5095,2860)
  other v1: 4940,1215
36: S3.2 STC1.34 | length 2038.4
  Top Layer w10: S3.2 5295,2770.59 v1(5295,3045)
  Bottom Layer w10: STC1.34 3595,2985 3665,3055 5285,3055 v1(5295,3045)
37: S4.2 STC1.33 | length 2156.3
  Top Layer w10: v1(5205.5,3019.5) 5205.5,2553.91 S4.2
  Bottom Layer w10: STC1.33 3695,2989 3735,3029 5196,3029 v1(5205.5,3019.5)
40: P7.3 STC1.19 | length 1905.9
  Top Layer w10: P7.3 3310,3240 3310,2931.11 3312,2929.11 3312,2910.89 3310,2908.89 3310,2830 3455,2685 v1(3460,2685)
  Bottom Layer w10: v1(3460,2685) 3460,2595 3545,2510 4420,2510 4450,2480 4450,2390 4485,2355 STC1.19
41: P7.4 STC1.36 | length 468.7
  Top Layer w10: P7.4 3405,3045 STC1.36
42: P7.5 STC1.42 | length 1064.1
  Top Layer w10: v1(3495,2725) 3435,2785 3430,2785 3360,2855 3360,3305 3485,3305 3500.47,3289.53 3500.47,3249.53 P7.5
  Bottom Layer w10: v1(3495,2725) 3495,2620 3555,2560 3590,2560 STC1.42
43: P7.6 STC1.55 | length 1623.6
  Top Layer w10: P7.6 3610,3245 3830,3025 v1(3830,1855)
  Bottom Layer w10: P7.6@3605,3242.5 P7.6 ; STC1.55 v1(3830,1855)
45: S5.4 STC1.64 | length 2201.7
  Top Layer w10: v1(4595,1385) 4595,1705 4790.53,1900.53 4790.53,2346.79 4751.84,2385.47 4751.84,2428.16 S5.4
  Bottom Layer w10: STC1.64 3595,1440 3659.5,1375.5 4303.39,1375.5 4315.89,1363 4334.11,1363 4347,1375.89 4347,1380.89 4351.11,1385 v1(4595,1385)
46: P5.2 STC1.63 | length 862.3
  Top Layer w10: v1(4325,1385) 4325,1230 4350,1205 P5.2
  Bottom Layer w10: STC1.63 3696.63,1455 3760.13,1391.5 4323.5,1391.5 4325,1390 v1(4325,1385)
50: P3.2 STC1.32 | length 2896.3
  Top Layer w10: v1(5490,2925) 5490,2678.38 5475,2663.38 5475,2420 5520,2375 5619.14,2375 5625,2369.14 5625,1635 5605,1615 5585,1615 5485,1515 5485,1440 P3.2
  Bottom Layer w10: STC1.32 4435.53,2914.47 5476.23,2914.47 5486.75,2925 v1(5490,2925)
51: P3.1 STC1.31 | length 2686.4
  Top Layer w10: P3.1 5655,1570 v1(5655,2955)
  Bottom Layer w10: STC1.31 v1(5655,2955)
53: R16.2 STC1.6 U6.4 | length 2290.1
  Top Layer w10: U6.4 2751,1096.07 2789.45,1057.62 4002.62,1057.62 4060,1115 4060,1345 4220,1505 v1(4220,1655)
  Bottom Layer w10: v1(2745,1165) 2747.3,1167.3 2747.3,1190.64 2805.55,1248.9 R16.2 R16.2@2805.55,1261.1 ; v1(4220,1655) STC1.6
60: R13.3 STC1.10 U5.16 | length 1954.7
  Top Layer w10: v1(3360,1375) 3360.37,1375.37 3360.37,1434.31 R13.3 ; v1(4271.5,1353.5) 4271.5,1361.78 4280,1370.28 v1(4280,1855)
  Bottom Layer w10: U5.16 3305.52,1299.41 3360,1353.89 v1(3360,1375) 3360,1460 3430,1530 3455,1530 3628,1357 4268,1357 v1(4271.5,1353.5) ; v1(4280,1855) 4375,1855 4385,1865 STC1.10
61: R14.3 STC1.9 U5.12 | length 1893
  Top Layer w10: R14.3 3347.4,1267.4 3390,1310 3840,1310 3935,1405 v1(3935,1805)
  Bottom Layer w10: U5.12 3317.95,1197.05 3344,1171 3344,1146 v1(3345,1145) ; v1(3935,1805) 3944.47,1814.47 4454.47,1814.47 STC1.9
62: R13.4 STC1.12 U5.15 | length 1981.5
  Top Layer w10: v1(3395,1395) 3396.58,1396.58 3396.58,1433.11 R13.4 ; v1(3785,1335) 3825,1335 3910,1420 v1(3910,1495) ; v1(4320,1470) 4320,1880 STC1.12
  Bottom Layer w10: U5.15 3318.82,1273.82 3392.7,1347.7 3392.7,1392.7 v1(3395,1395) 3395,1455 3435.53,1495.53 3449.47,1495.53 3610,1335 v1(3785,1335) ; v1(3910,1495) 4295,1495 v1(4320,1470)
64: R14.1 STC1.22 U5.14 | length 2426
  Top Layer w10: R14.1 3416.3,1203.7 v1(3415,1205) 3415,1255 3430,1270 3895,1270 3978,1353 3978,2448 v1(3980,2450)
  Bottom Layer w10: U5.14 3371.46,1248.23 3414.69,1205 v1(3415,1205) ; v1(3980,2450) 4390,2450 STC1.22
66: R14.2 STC1.24 U5.13 | length 2515.8
  Top Layer w10: R14.2 3378.9,1183.9 v1(3380,1185) 3380,1260 3410,1290 3870,1290 3957,1377 3957,2543 v1(3955,2545)
  Bottom Layer w10: U5.13 3342.36,1222.64 v1(3380,1185) ; v1(3955,2545) 3967.7,2557.7 4392.3,2557.7 STC1.24
70: J3.6 STC1.35 | length 2543.2
  Top Layer w10: v1(4260,2220) v1(4260,2860)
  Bottom Layer w10: STC1.35 3697.7,2857.7 4257.7,2857.7 v1(4260,2860) ; v1(4260,2220) 4265.53,2214.47 4570,2214.47 4595,2189.47 5234.47,2189.47 5255,2210 v1(5575,2210)
71: J3.4 STC1.38 | length 2450.4
  Top Layer w10: J3.4 5308.66,2375.11 5410,2476.45 v1(5410,2805)
  Bottom Layer w10: STC1.38 3645,2805 v1(5410,2805)
72: J3.2 STC1.37 | length 2835.8
  Top Layer w10: STC1.37 3704.39,2745.61 3704.39,2725.61 3760,2670 v1(3760,2260) ; J3.2 5420.87,1895.87 5470,1945 v1(5470,2285)
  Bottom Layer w10: v1(3760,2260) 4119.75,2260 4155.28,2295.53 4514.45,2295.53 4524.98,2285 v1(5470,2285)
73: J3.5 STC1.40 | length 2903.1
  Top Layer w10: v1(3755,2920) 3770,2905 v1(3770,2710) ; J3.5 5420.87,2464.69 5445,2488.82 v1(5445,2980)
  Bottom Layer w10: STC1.40 3650,2710 v1(3770,2710) ; v1(3755,2920) 3835,3000 4632.5,3000 4652.5,2980 v1(5445,2980)
74: J2.2 STC1.51 | length 2471.3
  Top Layer w10: J2.2 2825.58,2390 2835.51,2399.93 2835.51,2457.17 2955,2576.66 v1(2955,2710) ; v1(3875,2895) 3920,2850 3920,2635 3907,2622 3907,2042 v1(3905,2040)
  Bottom Layer w10: v1(2955,2710) 3040,2710 3225.53,2895.53 3874.47,2895.53 v1(3875,2895) ; STC1.51 3697.7,2042.3 3902.7,2042.3 v1(3905,2040)
75: J3.3 STC1.54 | length 2225.2
  Top Layer w10: v1(5555,1905) 5575,1905 5575,1727.01 J3.3
  Bottom Layer w10: STC1.54 3640,2000 4540,2000 4565,1975 5314.58,1975 5384.58,1905 v1(5555,1905)
76: S5.3 STC1.53 | length 1803.1
  Top Layer w10: S5.3 4762.97,2530 4835,2457.97 v1(4835,1935)
  Bottom Layer w10: STC1.53 3710,1940 3795,1940 3820.53,1914.47 4814.47,1914.47 v1(4835,1935)
77: R8.2 STC1.56 | length 1789.4
  Top Layer w10: v1(3220,1840) 3245,1865 3585,1865 STC1.56
  Bottom Layer w10: R8.2 2320,1120 2650,1450 3105,1450 3150,1495 3150,1770 v1(3220,1840)
-Vcheck: ADC1.10 C12.2 U3.5 | length 4124.8
  Top Layer w25: U3.5 v1(1675,2665)
  Bottom Layer w25: C12.2 1670.75,2667.01 1780,2776.26 1780,2850 1880,2950 3070,2950 3270,3150 3995,3150 4000,3145 5321.35,3145 5395,3218.65 ADC1.10
ADC1: ADC1.2 STC1.50 | length 1638.6
  Top Layer w10: v1(4000,2100) 4002,2102 4002,3037 ADC1.2
  Bottom Layer w10: STC1.50 3650,2100 v1(4000,2100)
ADC2: ADC1.3 STC1.49 | length 1559.8
  Top Layer w10: 4030,2985 4275,3230 ADC1.3 ; v1@4032.5,2135 4032.5,2985
  Bottom Layer w10: STC1.49 3715,2135 v1(4030,2135)
ADC3: ADC1.4 STC1.60 | length 2243.2
  Top Layer w10: v1@4065,1710 4065,2970 4275,3180 4363.86,3180 4390,3206.14 4366.14,3230 ADC1.4
  Bottom Layer w10: STC1.60 3605,1655 3660,1710 v1(4070,1710)
ADC4: ADC1.5 STC1.59 | length 2228.6
  Top Layer w10: v1@4097.5,1660 4097.5,2955 ; 4100,2955 4285,3140 4435,3140 4495,3200 ADC1.5
  Bottom Layer w10: STC1.59 3697.7,1657.7 4097.7,1657.7 v1(4100,1660)
ADC5: ADC1.6 STC1.61 | length 2396.3
  Top Layer w10: v1(4115,1560) 4130,1575 4130,2945 4305,3120 4460,3120 4570,3230 ADC1.6
  Bottom Layer w10: STC1.61 4110,1555 v1(4115,1560)
ADC6: ADC1.7 STC1.5 | length 2642.1
  Top Layer w10: v1(4165,1695) 4165,1725 4165,2940 4325,3100 4645,3100 4675,3130 4995,3130 ADC1.7
  Bottom Layer w10: v1(4165,1695) 4165.53,1695.53 4454.47,1695.53 STC1.5
ADC7: ADC1.8 STC1.7 | length 2614.8
  Top Layer w10: v1(4195,1790) 4195,2930 4344,3079 4659,3079 4685,3105 5070,3105 ADC1.8
  Bottom Layer w10: v1(4195,1790) 4273.47,1711.53 4451.53,1711.53 STC1.7
ADC8: ADC1.9 STC1.14 | length 2233.4
  Top Layer w10: v1(4225,2065) 4225,2930 4350,3055 4675,3055 4700,3080 5145,3080 ADC1.9
  Bottom Layer w10: v1(4225,2065) 4385,2065 STC1.14
ADC9: STC1.16
DGND: *1.1 *1.2 *1.3 *1.4 *1.7 C20.1 C21.1 C22.1 C23.1 J3.1 L7.2 P3.3 P5.3 P6.5 P6.6 P7.2 P8.1 R1.2 R2.2 R3.2 R13.5 R13.6 R13.7 R13.8 R14.5 R14.6 R14.7 R14.8 S3.1 S4.1 S5.9 S5.10 S5.11 S5.12 S5.13 S5.14 S5.15 S5.16 SW5.1 SW5.2 SW5.3 U4.8 U5.1 U5.10 U5.19 U6.1 | length 1133.4
  Top Layer w10: v1(3250,1715) 3265,1715 3292.01,1687.99 3311.69,1687.99 C23.1 ; SW5.1 SW5.2 SW5.3
  Top Layer w20: P7.2 3210,3240 3210,2850 U4.8 3360,2700 v1(3360,2655)
  Bottom Layer w10: R2.2 2476.1,1490 R1.2 2570,1485 R3.2
  other v1: 5585,1065 3525,1120 3170,1140 5340,1155 4795,1290 3165,1345 2500,1390 3055,1410 5041,1430.95 3495,1640 5310,1720 3430,1790 3460,1985 3270,1995 4890,2370 5560,2465 4900,2590 5560,2780 3040,3035 3035,3110
EN: DRIVE1.5 U5.8 | length 411.2
  Bottom Layer w10: U5.8 3537.36,1222.64 3655,1105 3780,1105 3805.31,1130.31 3805.31,1160.31 DRIVE1.5
GND: C1.2 C2.2 C3.1 C4.2 C5.2 C6.1 C8.1 C9.1 C10.2 C12.1 C13.1 C14.2 C15.1 C16.2 C18.1 C19.1 J2.3 L4.2 L5.2 L6.2 P4.1 Q1.2 R1.1 R2.1 R3.1 R5.1 STC1.1 STC1.3 SW1.2 SW2.2 U1.1 U1.2 U2.2 U2.4 U3.3 U3.6 | length 7339.1
  Top Layer w25: v1(1240,2505) 1245,2510 1353.11,2510 1368.11,2495 1625,2495 ; v1(1620,2290) 1620,2347.64 1630,2357.64 U3.3 1625,2495 ; U3.6 1625,2495 ; U1.2 U1.1 ; SW2.2 2205,1585 2175,1555 2060,1555 2015,1510 2015,1190 2180,1025 4450,1025 4550,1125 4550,1257.89 4495,1312.89 STC1.1 STC1.3
  Bottom Layer w25: C2.2 1125,2345.98 v1(1125,2510) ; v1(1620,2290) 1680,2290 1740,2350 1770,2350 ; v1(1655,2792.99) C12.1@1658.5,2796.5 ; v1(1840,2465) 1821.1,2465 1776.1,2510 C13.1 1770,2350 ; v1(2025,2510) 2089.45,2510 v1(2105,2494.45) ; R5.1 2230,2155 2250,2135 2465,2135 2485,2155 C15.1 ; Q1.2 2376.48,1302.81 2400.36,1302.81 2415,1317.46 2415,1525 2439.67,1549.67 2464.67,1549.67 R2.1 2475.55,1559.45 2564.45,1559.45 R1.1 2567.5,1556.4 2657.5,1556.4 R3.1 ; C19.1 2398.9,1859.45 2366.12,1892.22 2307.93,1892.22 C16.2 2210.71,1915.16 2196.06,1900.51 2196.06,1894.41 2176.1,1874.45 C9.1 2163.9,1874.45 2153.56,1884.78 2153.56,1890.89 2122.28,1922.17 C5.2 1887.28,1922.17 1810.89,1998.56 1804.78,1998.56 1794.45,2008.9 L5.2 L4.2 1794.17,2122.78 1794.17,2229.72 L6.2 1793.9,2236.1 1770,2260 1770,2350 ; P4.1@2571.5,2796.5 P4.1
  Bottom Layer w50: v1(1125,2510) 1130.55,2504.45 C6.1
  other v1: 1275,2740
NetC7_1: C7.1 U3.2 | length 108.8
  Top Layer w25: v1(1545,2450) 1560.36,2450 1575,2435.36 U3.2
NetC7_2: C7.2 U3.4 | length 82.4
  Top Layer w25: U3.4 v1(1675,2445)
NetC11_2: C11.2 R5.2 | length 167.2
  Bottom Layer w25: R5.2 2240.33,2284.67 2285.33,2284.67 2300,2270 2300,2244.64 2340.93,2244.64 2355,2230.57 C11.2
NetD1_2: D1.2 R6.2 | length 100
  Top Layer w30: D1.2 R6.2
NetD2_1: D2.1 P2.2 S2.2 S2.3 | length 309.4
  Top Layer w25: S2.3@1655,1725 S2.3 1655,1775 1825,1775 D2.1
NetD2_2: D2.2 R7.2 | length 295.7
  Top Layer w25: R7.2@1875,1482.17 1875,1630 R7.2@1875,1482.17
NetJ1_2: J1.2 Q1.3 | length 97.1
  Bottom Layer w12: 2290,1315 2290,1305 2295,1300 J1.2
NetJ2_1: J2.1 R9.1 | length 231.6
  Top Layer w20: v1@2747.12,2302.88 v1(2740,2310) 2740,2446.73 2783.27,2490 J2.1
NetL1_1: L1.1 L2.1 L3.1 S1.1 S1.2
NetL7_1: L7.1 R17.2 | length 134
  Top Layer w50: L7.1 3867.72,3142.17 3867.72,3175.39 3935.55,3243.23 R17.2
NetQ1_1: Q1.1 R8.1 | length 455.3
  Bottom Layer w10: R8.1 2200,1130.55 2200,1278.89 2200,1285 2200,1380 2220,1400 2342.68,1400 2370.28,1372.4 Q1.1
NetR4_2: R4.2 U1.8 | length 156.3
  Top Layer w10: U1.8 2485,2585 v1(2530,2540)
NetR13_1: R13.1 U5.18 | length 133.1
  Top Layer w10: R13.1 3293.43,1433.11 3293.43,1371.57 v1(3295,1370)
  Bottom Layer w10: U5.18 3275.59,1350.59 v1(3295,1370)
NetR13_2: R13.2 U5.17 | length 185.9
  Top Layer w10: v1(3325,1350) 3327.13,1352.13 3327.13,1432.56 R13.2
  Bottom Layer w10: U5.17 3300,1325 v1(3325,1350)
NetR14_4: R14.4 U5.11 | length 85
  Bottom Layer w10: U5.11 3283.54,1171.46 v1(3310,1145)
PGND: C17.2 L4.1 L5.1 L6.1 P1.2 P2.1 R6.1 R7.1 | length 852.9
  Bottom Layer w20: v1(1135,2115) 1250,2230 L6.1 1725.28,2229.72 1725.28,2122.78 L4.1 L5.1
PWM1: DRIVE1.4 U5.4 | length 336.1
  Bottom Layer w10: U5.4 3496,1319 3581,1319 3620,1280 3730,1280 3760,1250 DRIVE1.4
PWM2: DRIVE1.2 U5.5 | length 260.8
  Bottom Layer w10: U5.5 3575.59,1299.41 3625,1250 3685,1250 3710,1225 DRIVE1.2
PWM3: DRIVE1.1 U5.6 | length 265.1
  Bottom Layer w10: U5.6 3561.18,1273.82 3670,1165 DRIVE1.1
PWM4: DRIVE1.3 U5.7 | length 336.4
  Bottom Layer w10: U5.7 3546.77,1248.23 3665,1130 3729.93,1130 3760,1160.07 DRIVE1.3
Servo-PWM: J2.4 P4.3 R10.2 | length 784
  Top Layer w20: P4.3 2940,2800 3053.11,2686.89 J2.4 2995,2490 2960,2455 2960,2350 2995,2315 v1(2995,2305)
V-FUTUBA: D3.2 P4.2 R10.1 | length 928.7
  Bottom Layer w20: D3.2@2915.79,2177.99 D3.2@2926.4,2188.6 ; D3.2@2935,2180 D3.2@2926.4,2188.6 ; R10.1 3068.9,2208.11 2945.91,2208.11 D3.2@2926.4,2188.6
  Bottom Layer w50: P4.2 2686.73,2798.27 2686.73,2718.27 3066.73,2338.27 3066.73,2302.17 R10.1
V_check: ADC1.11 C10.1 C13.2 U2.3 U3.8 | length 4250.2
  Bottom Layer w30: v1(1525,2567.36) 1536.54,2578.9 C13.2 ; 1840,2580 1840,2680 2040,2880 3080,2880 3285,3085 5380,3085 5480,3185 5480,3215 ADC1.11
  other v1: 1495,2590 1825,2615
V_POWER: P1.1 S1.3 S2.1 | length 679
  Top Layer w50: P1.1 1188.15,1355.94 1222.2,1390 S1.3 1247.5,1387.5 1627.5,1387.5 S2.1
VCC5.0-1: C11.1 C15.2 R4.1 STC1.2 U1.5 U1.6 U1.7 | length 4202
  Top Layer w50: v1(2355,2340) 2381.93,2366.93 2381.93,2435 U1.5 ; v1(2535,2465) 2540,2470 2600,2470 2600,2610 2450,2760 2450,2870 2505,2925 2910,2925 3165,2670 3165,1680 3175,1670 3175,1615 3210,1580 3425.71,1580 3455,1550.71 3455,1480 3555,1380 3730,1380 3780,1430 v1(3815,1430)
  Bottom Layer w50: v1(2355,2340) 2381.61,2366.61 2482.83,2366.61 C15.2 2487.17,2366.61 2488.94,2366.61 2530,2407.68 R4.1@2530,2465 ; v1(3815,1430) 4000,1430 4002,1428 4365.55,1428 4392.55,1455 STC1.2
  other v1: 2485,2365 2395,2395 2395,2465 2390,2520
VCC7.2: C1.1 C2.1 C3.2 C5.1 C6.2 C9.2 C17.1 D1.1 D3.1 L1.2 L2.2 L3.2 SW2.1 U1.3 U1.4 U2.1 | length 3860
  Top Layer w25: C17.1@1460,2125 C17.1 ; D1.1 1614.8,2020 1510,2020 1485,2045 C17.1@1485,2100 ; C17.1 C17.1@1485,2100 ; C17.1 C17.1@1485,2100
  Top Layer w50: v1(1240,2435) 1250.55,2424.45 U2.1 1358.11,2296.89 1470,2185 C17.1@1470,2125 ; v1(2015,1795) 1995,1795 1895,1895 v1(1895,2025) 1865,2025 1770,2120 ; C1.1@2034.57,2366.57 1968.86,2366.57 1950,2347.72 1746.14,2143.86 1770,2120 ; C17.1@1470,2125 1460,2125 C17.1@1470,2125 ; 1770,2120 C17.1 1770,2120
  Bottom Layer w50: C2.1 C2.1@1238.23,2333.23 ; v1(1895,2025) 1895.98,2025.98 D3.1 ; C5.1 C5.1@2052.2,1803.39 ; v1(2045,2375) 2105,2375 C3.2 ; C9.2 C9.2@2167.83,1803.39 ; C2.1@1238.23,2333.23 1238.23,2435 C2.1@1238.23,2333.23 ; C5.1@2052.2,1803.39 C9.2@2167.83,1803.39 ; C5.1@2052.2,1803.39 C9.2@2167.83,1803.39
  other v1: 2070,1795 1460,2105 1400,2115 1525,2115 1515,2155 1395,2160 1230,2315 1235,2355
VCC-3.3-all: *1.8 C14.1 C18.2 C23.2 P7.1 R9.2 SW1.3 SW3.1 SW3.2 SW3.3 U4.7 | length 3413.2
  Top Layer w20: v1(3250,1765) 3294.33,1765 3324.02,1735.31 C23.2
  Top Layer w25: P7.1 3105,2855 U4.7
  Top Layer w50: v1(2805,1810) 2815,1800 v1(2840,1800) 2860,1780 SW1.3 2860.65,1665.65 3064.35,1665.65 SW3.2 ; SW3.3 SW3.2 ; SW3.1 SW3.2
  Bottom Layer w20: R9.2 2671.1,2228.9 2800,2100 3065,2100 ; 3065,1905 3080,1890 3245,1890 3260,1875 3260,1775 v1(3250,1765) ; U4.7@3244.43,2705 U4.7
  Bottom Layer w50: C14.1@2840.43,1812.44 2924.57,1812.44 2938.23,1826.1 C18.2 ; SW3.1 3065,1905 3065,2045 ; 3065,2085 3065,2045 ; U4.7 3253.27,2703.27 3198.27,2703.27 3085,2590 3085,2440 3170,2355 3170,2150 3065,2045
VCC-5-all: C4.1 C8.2 C16.1 C19.2 C20.2 C21.2 C22.2 J1.1 P3.4 P5.4 P6.7 P8.2 R11.1 R12.1 R15.1 R16.1 SW1.1 SW2.3 SW4.1 SW4.2 SW4.3 U5.20 U6.2 | length 7335.8
  Top Layer w20: C20.2 3115,1363.28 3176.72,1425 v1(3235,1425)
  Top Layer w50: J1.1 2099.07,1220.93 2099.07,1484.07 SW4.3 SW4.2 SW4.1 ; v1(2520,1105) 2380,1245 2380,1405 SW4.1 ; v1(2550,1805) 2600,1805 2650,1755 SW1.1 2650,1662.99 2642.99,1670 2316.54,1670 SW2.3 2305,1490 SW4.1 ; v1(3100,1110) 3115,1125 C20.2
  Bottom Layer w20: C22.2 4807.83,1233.94 4838.94,1233.94 4895,1290 R15.1
  Bottom Layer w25: v1(2850,1165) 2873.56,1188.56 2873.56,1254.11 R16.1
  Bottom Layer w50: C16.1 C19.2@2404.45,1789.17 ; v1(2520,1105) 2845,1105 v1(2850,1110) ; C4.1 2589.37,1823.39 2682.83,1823.39 C8.2 ; v1(2850,1165) v1(2850,1110) ; C21.2@3099.72,1110.28 2995.28,1110.28 R12.1 v1(2850,1110) ; v1(3100,1110) C21.2@3100.55,1110 ; C21.2 C21.2@3100.55,1110 ; P5.4 4160,1060 ; 4331.71,1060 4160,1060 ; 4335,1065 4670.36,1065 ; P6.7 4690,1720 4690,1084.64 4670.36,1065 ; R15.1 4930.55,1289.45 5017.68,1289.45 ; v1(5035,1125) 5030,1130 v1(5030,1203.56) 5030,1277.13 5017.68,1289.45 ; P3.4 5450,1065 v1(5150,1065) ; C21.2@3100.55,1110 3150.55,1060 4160,1060 ; 4670.36,1065 v1(5150,1065) ; 5017.68,1289.45 5022.68,1294.45 R11.1 5165.55,1294.45 5205,1255 5205,1120 v1(5150,1065)
  other v1: 2310,1785 2260,1790 2585,1800
VSSA: ADC1.1 ADC1.12 R17.1
pads on no net: DRIVE1.6 DRIVE1.7 DRIVE1.8 J3.0 P5.1 P6.2 P6.8 P7.7 P7.8 P8.5 P8.6 S5.5 S5.6 S5.7 S5.8 STC1.4 STC1.8 STC1.11 STC1.13 STC1.15 STC1.17 STC1.18 STC1.20 STC1.21 STC1.23 STC1.25 STC1.26 SW1.0 SW2.0 U3.1 U3.7 U5.2 U5.3 U5.9 U6.5 U6.6 Uu1. Uu1.1 Uu2. Uu2.1 Uu3. Uu3.1 Uu4. Uu4.1

## Polygon pours and split planes (outlines as drawn)
GND on Top Layer "Top Layer-GND" (solid, pour order 110): 2000,1585 2010,1575 3150,1575 3200,1625 3200,2900 3000,2900 1100,2900 1022.5,2822.5 1010,2185 1015,2180 1275,2180 1275,2050 1795,2050 1805,2040 1805,1900 1980,1725 1980,1610
VCC5.0-1 on Top Layer "Top Layer-VCC5.0-1 1" (solid, pour order 120): 2325,2555 2325,2305 2390,2305 2390,2355 2595,2355 2600,2350 2620,2370 2620,2495 2430,2495 2430,2550 2425,2555
VSSA on Top Layer "Top Layer-No Net 5" (solid, pour order 116): 3965,3325 3965,3320 3960,1495 4350,1495 4355,1500 4345,1510 4345,2925 5665,2925 5670,2930 5675,2925 5690,2925 5690,3295 5645,3340 3965,3340
no net on Top Layer "Top Layer-No Net 4" (solid, pour order 84): 1511.6,3316.27 1461.47,2933.53 2975,2905 2975,3240 2970,3245 1990,3245 1910,3325
DGND on Top Layer "Top Layer-DGND" (solid, pour order 114): 3185,2885 2980,2885 2980,3250 3060,3330 3065,3325 3940,3325 3960,3305 3960,1495 4345,1495 4345,2925 5580,2925 5690,2925 5690,1060 5640,1060 5585,1005 2000,1005 1985,1020 1985,1560 1980,1570 3170,1570 3185,1585
PGND on Top Layer "Top Layer-PGND" (solid, pour order 74): 1005,2170 1005,1125 1125,1005 1970,1005 1970,1715 1790,1895 1790,2040 1230,2040 1230,2170
NetL1_1 on Top Layer "Top Layer-NetL1_1" (solid, pour order 78): 1135,1495 1140,1490 1385,1490 1385,1810 1375,1820 1135,1820
-Vcheck on Top Layer "Top Layer--Vcheck 1" (solid, pour order 60): 1660,2620 1660,2535 1705,2535 1705,2700 1625,2700 1625,2665 1625,2620
V_check on Top Layer "Top Layer-V_check 1" (solid, pour order 56): 1315,2625 1540,2625 1540,2535 1480,2535 1480,2585 1315,2585
VCC7.2 on Top Layer "Top Layer-VCC7.2" (solid, pour order 52): 1205,2460 1280,2460 1280,2450 1405,2450 1405,2385 1265,2385 1265,2270 1195,2270 1195,2405 1200,2410 1205,2410
VCC5.0-1 on Top Layer "Top Layer-VCC5.0-1" (solid, pour order 48): 2355,2550 2355,2415 2430,2415 2430,2550
VCC7.2 on Top Layer "Top Layer-VCC7.2 1" (solid, pour order 42): 2155,2500 2220,2500 2220,2375 2140,2375 2140,2340 1990,2340 1990,2420 2070,2420 2070,2450 2155,2450
VCC7.2 on Top Layer "Top Layer-VCC7.2 2" (solid, pour order 40): 1810,2195 1810,2065 1805,2070 1365,2070 1365,2165 1365,2195
VCC-3.3-all on Top Layer "Top Layer-VCC-3.3-all" (solid, pour order 36): 2775,1840 2775,1760 2830,1760 2830,1605 2990,1605 2990,1700 2895,1700 2895,1840
VCC-5-all on Top Layer "Top Layer-VCC-5-all" (solid, pour order 32): 2235,1820 2345,1820 2390,1820 2390,1720 2390,1595 2270,1595 2270,1745 2270,1750 2235,1750
VCC7.2 on Top Layer "Top Layer-VCC7.2 3" (solid, pour order 22): 2100.88,1720 2143.25,1720 2143.25,1600.63 1990.88,1600.63 1990.88,1835.63 2100.88,1835.63
V_POWER on Top Layer "Top Layer-V_POWER" (solid, pour order 0): 1095,1455 1750,1455 1750,1285 1745,1290 1260,1290 1260,1055 1240,1040 1085,1040 1055,1075 1055,1095 1055,1455
VCC5.0-1 on Bottom Layer "Bottom Layer-VCC5.0-1" (solid, pour order 126): 2355,2545 2355,2350 2510,2350 2555,2395 2555,2495 2430,2495 2430,2550 2360,2550
V_check on Bottom Layer "Bottom Layer-V_check" (solid, pour order 106): 1740,2635 1740,2555 1885,2555 1885,2635
V_check on Bottom Layer "Bottom Layer-V_check 1" (solid, pour order 104): 1525,2600 1795,2600 1795,2555 1790,2560 1535,2560 1535,2535 1475,2535 1475,2625 1525,2625
VSSA on Bottom Layer "Bottom Layer-No Net 3" (solid, pour order 100): 3910,3330 3910,3030 3920,3020 5650,3020 5695,3065 5695,3310 5685,3310 5645,3350 3905,3350
no net on Bottom Layer "Bottom Layer-No Net 10" (solid, pour order 86): 1830,2925 1835,2930 2975,2930 2975,3245 1990,3245 1905,3330 1830,3330
DGND on Bottom Layer "Bottom Layer-DGND" (solid, pour order 112): 2415,1435 2420,1430 2430,1440 2430,1520 3010,1520 3020,1510 3020,3330.25 3892.5,3328.53 3896.44,2933.53 4863.53,2933.53 5611.47,2933.53 5670,2875 5670,1080 5610,1020 2055,1020 2050,1025 2045,1020 2025,1020 2025,1430 2030,1435
PGND on Bottom Layer "Bottom Layer-PGND" (solid, pour order 72): 1010,2210 1010,1100 1095,1015 2020,1015 2010,1025 2010,1710 1760,1960 1760,2260 1750,2270 1575,2270 1545,2240 1245,2240 1215,2210
GND on Bottom Layer "Bottom Layer-GND" (solid, pour order 108): 1100.91,2909.52 1015,2793.44 1015,2220 1510,2220 1565,2275 1770,2275 1770,1980 1885,1865 2120,1865 2120,1620 2165,1575 2385,1575 2430,1530 3180,1530 3240,1590 3240,2500 3240,2929.69 3215,2930
VCC-5-all on Bottom Layer "Bottom Layer-VCC-5-all" (solid, pour order 38): 3275,1395 3200,1395 3200,1450 3275,1450
VCC7.2 on Bottom Layer "Bottom Layer-VCC7.2" (solid, pour order 20): 1350,2195 1350,2020 1115,2020 1115,1945 1120,1950 1480,1950 1565,1950 1565,2075 1565,2195
NetD2_1 on Bottom Layer "Bottom Layer-No Net" (solid, pour order 16): 1765,1035 1750,1050 1750,1230 1790,1230 1790,1485 1470,1485 1470,1845 1830.14,1845 1970,1442.2 1970,1035
NetL1_1 on Bottom Layer "Bottom Layer-NetL1_1" (solid, pour order 6): 1405,1500 1095,1500 1095,1935 1410,1930
V_POWER on Bottom Layer "Bottom Layer-V_POWER" (solid, pour order 2): 1060,1455 1350,1455 1355,1450 1355,1285 1260,1285 1260,1220 1260,1050 1235,1025 1100,1025 1040,1085 1040,1250 1060,1270

## Keep-outs
Keep-Out Layer:
  lines w10: 1100,1000 990,1110 990,2800 1120,2930 1300,2930 1465,2930 1465,3140 cw(c1647.5,3142.5) 1645,3325 1910,3325 1990,3245 2950,3245 3060,3355 4595,3355 4975,3355 4975,3533.57 4976.43,3535 cw(c5150,3535) 5323.57,3535 ; 1101.13,998.87 1903.87,998.87 1903.87,795.03 ccw(c2070,790) 2235.99,798.51 2235.99,999.01 2236.98,1000 4575,1000 4587.8,987.2 4587.8,800 ccw(c4765,800) 4942.2,800 4942.2,997.8 4944.4,1000 5580,1000 5705,1125 5705,2835 5705,3300 5650,3355 ; 5325,3535 5325,3370 5325,3350 5645,3350

## Silkscreen, mask and mechanical layers (free items; w line width, h text height)
Top Overlay:
  drawing of 5668 lines, arcs and shapes, not listed
Top Solder:

## Dimensions
5150,3535 to 1645,3140 on Mechanical 1
5150,3535 to 4765,800 on Mechanical 1
5150,3535 to 4765,800 on Mechanical 1
5150,3535 to 1645,3140 on Mechanical 1
2070,800 to 4765,800 on Mechanical 1
1645,3140 to 2070,800 on Mechanical 1
5590,2950 to 5285,1035 on Mechanical 1
5705,1125 to 990,1110 on Mechanical 1

## Text inside footprints (layer, text, board x,y; h text height)
D1: Top Overlay "+" at 1604.8,2059 h45 r270
D2: Top Overlay "+" at 1858.58,1770.42 h45 r270
P6: Top Overlay "2" at 5165,1715 h45 r180; Top Overlay "1" at 5145,1815 h45 r180; Top Overlay "7" at 4705,1815 h45 r180; Top Overlay "8" at 4705,1715 h45 r180